# Allegro board SAPD_A3.brd
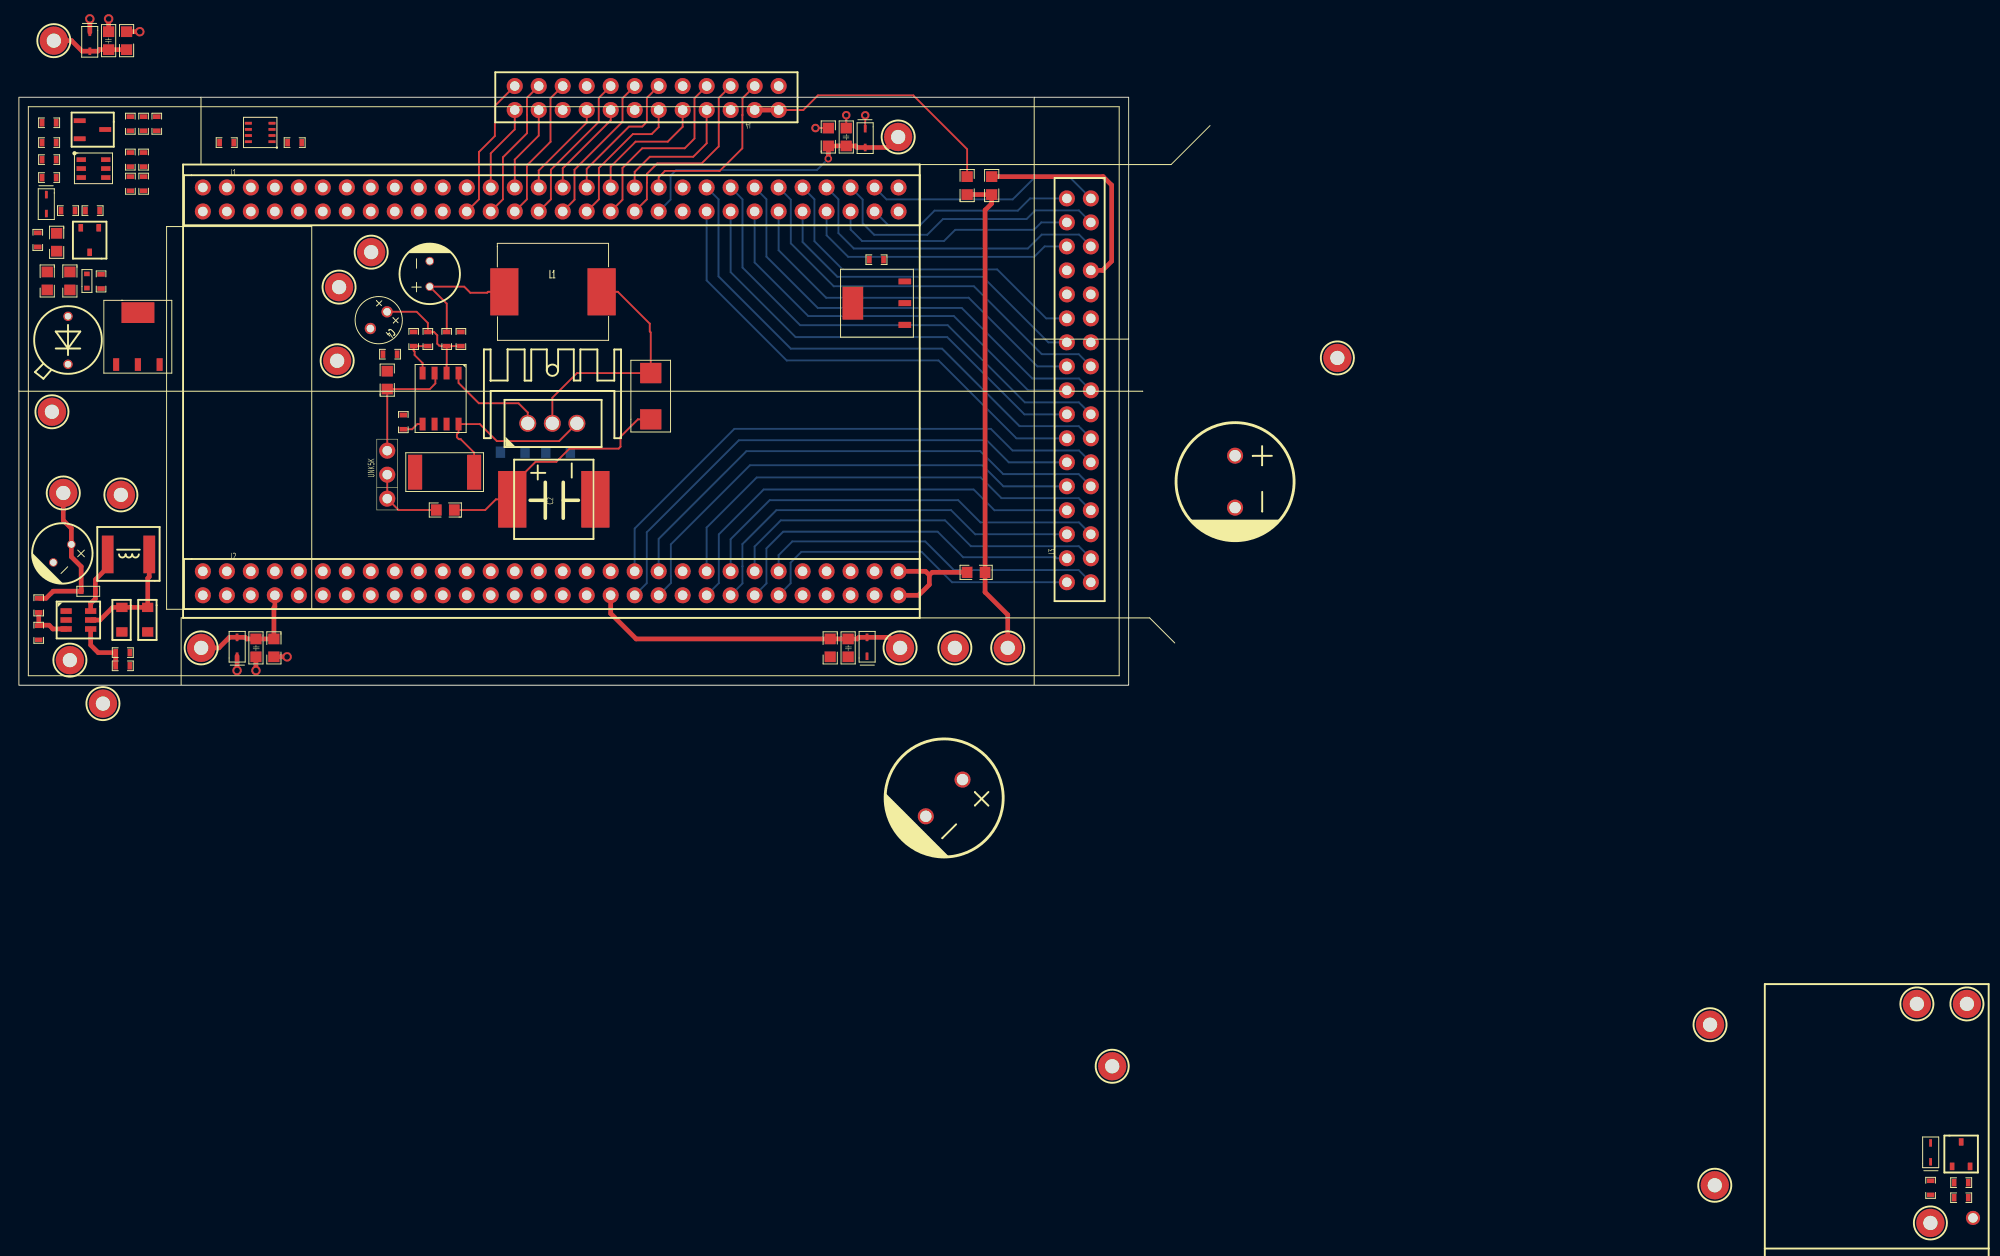
[diagram p0: board, top side]
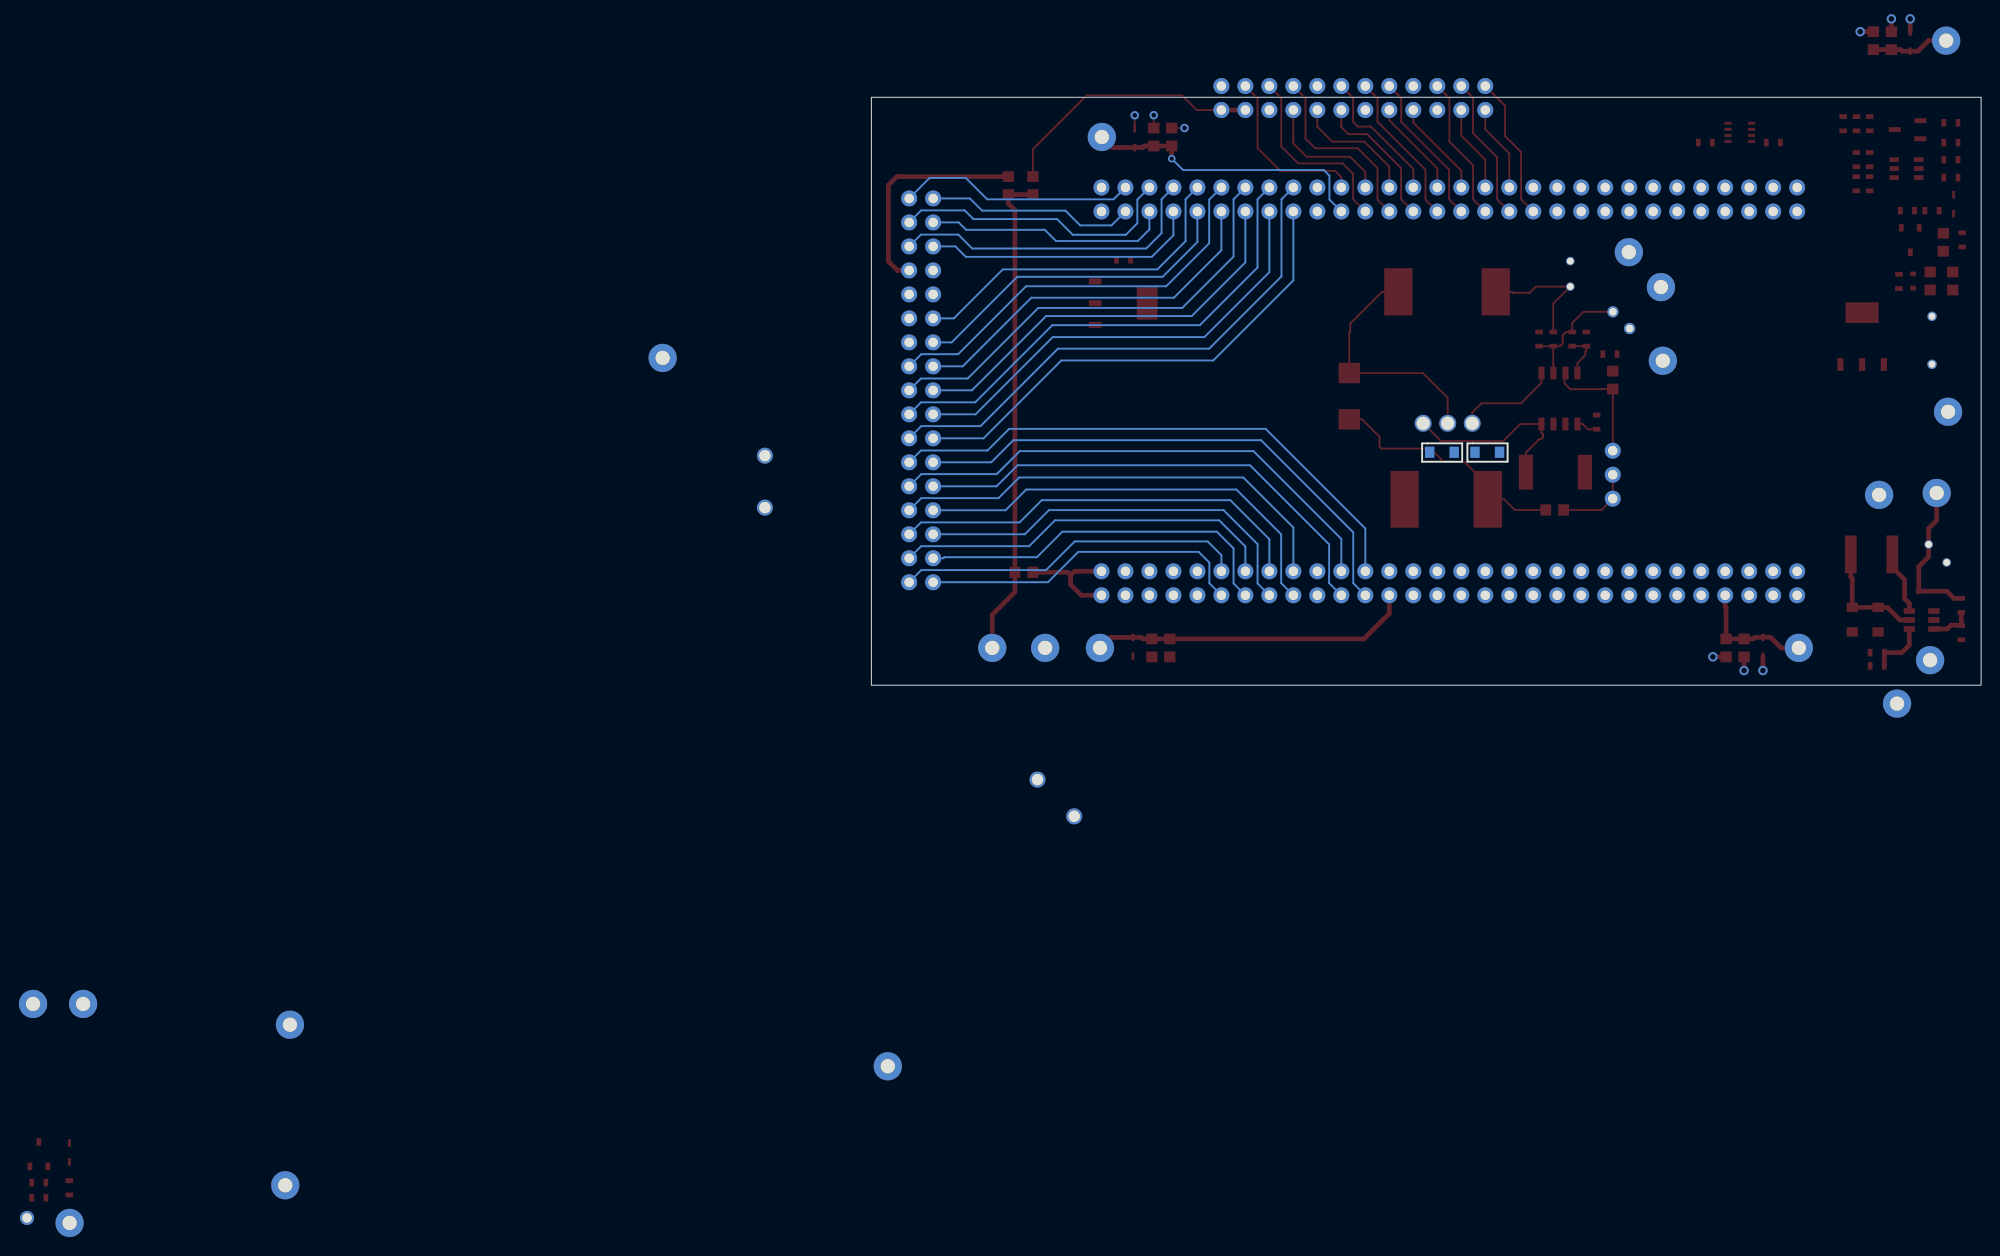
[diagram p1: board, bottom side, seen from below]

Outline 117.5 x 62.25 mm; copper layers: TOP, BOTTOM. Coordinates in mm from the lower left corner of the outline.
Outline path: rectangle 0,0 117.5,62.25

## Design rules (mm)
constraint set DEFAULT: 

## Placement (name value [footprint] x y rotation side)
C1  100uF/35V  [THR-CAP-6D3X11MM]  43.5 43.55 90 top
C2  4.7uF/400V  [SMD-CAP-8D4X8D4MM]  60.84 15.48 90 top
C3  0.1uF/16V  [C0603]  4 56.05 180 top
C4  10uF/35V  [CAP-D5XL11MM]  38.1 38.65 225 top
C5  0.1uF/16V  [C0603]  11.41 53.9 270 top
C6  10uF/16V  [C0603]  12.81 53.9 270 top
C7  0.1uF/35V  [C0603]  47.2 35.85 90 top
C8  100nF/400V  [CAP-D12D5XL16MM]  128.77 21.55 270 top
C9  0.1uF/35V  [C0603]  41.1 27.05 90 top
C15  100uF/35V  [THR-CAP-6D3X11MM]  4.6 13.95 225 top
C19  10uF/35V  [C1210]  10.89 6.95 270 top
C20  10uF/35V  [C1210]  13.62 6.95 270 top
C24  DNP  [R1210]  52.3 24.65 180 bottom
C25  0.1uF/250V  [CAP-D12D5XL16MM]  97.97 -11.94 225 top
C26  0.1uF/16V  [C0805]  24.5 5 270 top
C27  0.1uF/16V  [C0805]  10.1 67.19 90 top
C28  0.1uF/16V  [C0805]  87.2 5 270 top
C29  0.1uF/16V  [C0805]  88.2 56.99 90 top
C30  0.1uF/16V  [C0603]  1.6 47.95 270 top
C31  0.1uF/16V  [C0603]  90 44.65 0 top
C32  0.1uF/16V  [C0603]  28.4 57.05 0 top
C33  0.1uF/16V  [C0603]  21.2 57.05 0 top
D1  ES2F  [DO-214AA]  66.9 28.15 90 top
D2  PTVSLC3D3V3B  [SOD-323]  2.9 50.95 270 top
D3  BAS521  [SOD523]  7.2 42.05 90 top
D4  SAPD  [SAPD-THR-2P]  5.2 36.55 270 top
D7  BAS521-7  [SOD523]  6.6 9.95 0 top
D11  MM3Z12VT1G  [SOD-323]  202.42 -49.48 90 top
D12  PTVSLC3D3V3B  [SOD-323]  89.6 57.94 270 top
D13  PTVSLC3D3V3B  [SOD-323]  89.81 4.05 90 top
D14  PTVSLC3D3V3B  [SOD-323]  7.5 68.14 270 top
D15  PTVSLC3D3V3B  [SOD-323]  23.11 4.05 90 top
J1  Header-30x2  [DIP-30X2-2D54MM]  19.48 52.7 0 top
J2  Header-30x2  [DIP-30X2-2D54MM]  19.48 12.06 0 top
J3  Header-17x2  [DIP-17X2-2D54MM]  110.96 10.9 90 top
J4  Header-12x2  [DIP-12X2-2D54MM]  80.44 60.9 180 top
L1  100uH/2A  [IND-11D5X10X5MM]  51.4 41.65 0 top
L4  47uH/1A  [SMD-IND-5X5MM]  11.6 13.85 180 top
NOREF  -  []  0 0 90 top
NOREF#2  -  []  17.38 55.13 0 top
NOREF#3  -  []  17.38 7.13 90 top
NOREF#4  -  []  0 0 0 top
Q2  IRF644PbF  [TO-220AB]  53.88 27.73 0 top
Q3  FH3400C  [SOT-23]  7.5 47.15 180 top
Q5  FH3400C  [SOT-23]  205.64 -49.67 0 top
Q9  BSP316P  [SOT-223-3]  9.3 34.95 0 top
R3  DNP  [R0603]  11.4 60.25 270 top
R4  0  [R0603]  13.6 58.65 90 top
R5  10K  [R0603]  6 50.65 180 top
R6  100  [R0603]  8.6 50.65 180 top
R7  4.99K  [R0603]  4 59.95 180 top
R8  100K  [R0805]  3.4 47.95 270 top
R9  499  [R0603]  14.2 60.25 270 top
R10  682  [R0603]  4 57.85 180 top
R11  332K  [R0805]  2.4 43.85 270 top
R12  0  [R0805]  4.8 43.85 270 top
R13  1K  [R0603]  4 54.15 180 top
R15  1.5M  [R0805]  46.2 19.15 180 top
R16  10K  [R0603]  12.2 54.85 90 top
R17  DNP  [R0603]  44.9 37.45 270 top
R18  1M  [R0603]  9.1 41.95 90 top
R19  10K  [R0805]  39.6 31.25 90 top
R21  DNP  [R0603]  42.9 37.45 270 top
R22  10K  [R0603]  202.81 -54.02 90 top
R23  0  [R0603]  41.4 37.45 270 top
R24  DNP  [R0603]  38.5 34.65 0 top
R25  50m  [R2512]  48.2 22.55 180 top
R26  10K  [R0603]  204.85 -53.07 0 top
R28  100  [R0603]  206.45 -53.87 180 top
R33  182K  [R0603]  1.7 9.25 270 top
R35  10K  [R0603]  1.7 6.35 270 top
R36  DNP  [R0603]  11.8 3.85 180 top
R40  10K  [R0603]  11.8 2.45 180 top
R47  DNP  [R1210]  57.1 24.65 180 bottom
R48  0  [R0805]  101 51.85 90 top
R49  0  [R0805]  102.4 12.55 180 top
R50  0  [R0805]  103.6 51.85 90 top
R51  10K  [R0805]  26.4 5 270 top
R52  10K  [R0805]  12 67.19 90 top
R53  10K  [R0805]  85.3 5 270 top
R54  10K  [R0805]  86.3 56.99 90 top
R55  0  [R0603]  13.6 54.85 90 top
TP1  RESET  [TP_THR_CIR_3D0_1D5]  200.96 -33.75 0 top
TP2  VDD5X  [TP_THR_CIR_3D0_1D5]  206.26 -33.75 0 top
TP4  PWR_IN  [TP_THR_CIR_3D0_1D5]  37.3 45.85 0 top
TP5  HV1RET  [TP_THR_CIR_3D0_1D5]  179.06 -35.95 0 top
TP6  GND  [TP_THR_CIR_3D0_1D5]  115.76 -40.35 0 top
TP9  IC_PWR  [TP_THR_CIR_3D0_1D5]  33.9 42.15 0 top
TP11  ENABLE  [TP_THR_CIR_3D0_1D5]  33.7 34.35 0 top
TP12  HV1  [TP_THR_CIR_3D0_1D5]  179.56 -52.95 0 top
TP13  Vquench  [TP_THR_CIR_3D0_1D5]  202.39 -56.94 0 top
TP15  HVPS  [TP_THR_CIR_3D0_1D5]  3.5 28.95 0 top
TP16  QUENCH  [TP_THR_CIR_1D0_1D5]  206.9 -56.41 0 top
TP19  GND  [TP_THR_CIR_3D0_1D5]  10.8 20.15 0 top
TP20  Vquench  [TP_THR_CIR_3D0_1D5]  4.7 20.35 0 top
TP23  GND  [TP_THR_CIR_3D0_1D5]  5.4 2.65 0 top
TP24  5V~11V  [TP_THR_CIR_3D0_1D5]  8.9 -1.95 0 top
TP25  GND  [TP_THR_CIR_3D0_1D5]  93.1 58.05 0 top
TP26  GND  [TP_THR_CIR_3D0_1D5]  93.3 3.95 0 top
TP27  GND  [TP_THR_CIR_3D0_1D5]  3.7 68.25 0 top
TP28  GND  [TP_THR_CIR_3D0_1D5]  19.3 3.95 0 top
TP29  PWR_IN  [TP_THR_CIR_3D0_1D5]  104.7 3.95 0 top
TP30  PWR_IN  [TP_THR_CIR_3D0_1D5]  99.1 3.95 0 top
TP31  VDD5X  [TP_THR_CIR_3D0_1D5]  139.6 34.65 0 top
U1  TL431  [SOT-23-3-TL431]  6 60.25 270 top
U2  TLV3501AIDBVR  [SOT-23-6]  6.6 55.65 0 top
U3  MAX1771ESA+  [SO-8]  46.55 27.65 180 top
U5  MAX5026EUT-T  [SOT23-6]  6.3 6.95 270 top
U6  RS0102YH8  [SOT23-8]  24.3 57.55 90 top
U7  AMS1117-3.3  [SOT-223-3]  92.8 37.15 90 top
UNK5K  VR-5K  [SIP-3-2D54MM]  39 19.75 90 top

## Library data of the parts
C1 C2 C8 C15 C25 = C
C3-C7 C9 C19 C20 C24 C26-C33 = CAP NP
D1 D3 D4 D7 = DIODE
D2 D12-D15 = DIODE SCHOTTKY
D11 = DIODE ZENER
J1 J2 = Header30x2
J3 = Header-17x2
J4 = Header-12x2
L1 L4 = INDUCTOR
Q2 = IRF644PbF
Q3 Q5 = FH3400C
Q9 = BSP316P
R3-R13 R15-R19 R21-R26 R28 R33 R35 R36 R40 R47-R55 = R
TP1 TP2 TP4-TP6 TP9 TP11-TP13 TP15 TP16 TP19 TP20 TP23-TP31 = T POINT F
U1 = TL431/TI
U2 = TLV3501AIDBVR
U3 = MAX1771ESA+
U5 = MAX5026EUT-T
U6 = RS0102YH8
U7 = AMS1117-3.3
UNK5K = VR-5K

## Footprints (pads in the part's own frame, mm; a bottom-side part is the same pattern mirrored in y, then rotated)
C0603
  rect 0.5x0.8 smd: 1(0.05,0.4) 2(1.55,0.4)
C0805
  rect 1.14x1.2 smd: 1(0.1,0.6) 2(2,0.6)
C1210
  rect 1x1.2 smd: 1(-1.289,0.015) 2(1.311,0.015)
CAP-D5XL11MM
  round 1.2 hole 0.8: 1(-1.25,0) 2(1.25,0)
CAP-D12D5XL16MM
  round 1.7 hole 1.2: 1(-2.75,0) 2(2.75,0)
DIP-12X2-2D54MM
  round 1.7 hole 1: 1(0,-2.54) 2(0,0) 3(2.54,-2.54) 4(2.54,0) 5(5.08,-2.54) 6(5.08,0) 7(7.62,-2.54) 8(7.62,0) 9(10.16,-2.54) 10(10.16,0) 11(12.7,-2.54) 12(12.7,0) 13(15.24,-2.54) 14(15.24,0) 15(17.78,-2.54) 16(17.78,0) 17(20.32,-2.54) 18(20.32,0) 19(22.86,-2.54) 20(22.86,0) 21(25.4,-2.54) 22(25.4,0) 23(27.94,-2.54) 24(27.94,0)
DIP-17X2-2D54MM
  round 1.7 hole 1: 1(0,-2.54) 2(0,0) 3(2.54,-2.54) 4(2.54,0) 5(5.08,-2.54) 6(5.08,0) 7(7.62,-2.54) 8(7.62,0) 9(10.16,-2.54) 10(10.16,0) 11(12.7,-2.54) 12(12.7,0) 13(15.24,-2.54) 14(15.24,0) 15(17.78,-2.54) 16(17.78,0) 17(20.32,-2.54) 18(20.32,0) 19(22.86,-2.54) 20(22.86,0) 21(25.4,-2.54) 22(25.4,0) 23(27.94,-2.54) 24(27.94,0) 25(30.48,-2.54) 26(30.48,0) 27(33.02,-2.54) 28(33.02,0) 29(35.56,-2.54) 30(35.56,0) 31(38.1,-2.54) 32(38.1,0) 33(40.64,-2.54) 34(40.64,0)
DIP-30X2-2D54MM
  round 1.7 hole 1: 1(0,-2.54) 2(0,0) 3(2.54,-2.54) 4(2.54,0) 5(5.08,-2.54) 6(5.08,0) 7(7.62,-2.54) 8(7.62,0) 9(10.16,-2.54) 10(10.16,0) 11(12.7,-2.54) 12(12.7,0) 13(15.24,-2.54) 14(15.24,0) 15(17.78,-2.54) 16(17.78,0) 17(20.32,-2.54) 18(20.32,0) 19(22.86,-2.54) 20(22.86,0) 21(25.4,-2.54) 22(25.4,0) 23(27.94,-2.54) 24(27.94,0) 25(30.48,-2.54) 26(30.48,0) 27(33.02,-2.54) 28(33.02,0) 29(35.56,-2.54) 30(35.56,0) 31(38.1,-2.54) 32(38.1,0) 33(40.64,-2.54) 34(40.64,0) 35(43.18,-2.54) 36(43.18,0) 37(45.72,-2.54) 38(45.72,0) 39(48.26,-2.54) 40(48.26,0) 41(50.8,-2.54) 42(50.8,0) 43(53.34,-2.54) 44(53.34,0) 45(55.88,-2.54) 46(55.88,0) 47(58.42,-2.54) 48(58.42,0) 49(60.96,-2.54) 50(60.96,0) 51(63.5,-2.54) 52(63.5,0) 53(66.04,-2.54) 54(66.04,0) 55(68.58,-2.54) 56(68.58,0) 57(71.12,-2.54) 58(71.12,0) 59(73.66,-2.54) 60(73.66,0)
DO-214AA
  rect 2.16x2.26 smd: 1(0,0) 2(4.9,0)
IND-11D5X10X5MM
  rect 3x5 smd: 1(0,0) 2(10.3,0)
R0603
  rect 0.5x0.8 smd: 1(0.05,0.4) 2(1.55,0.4)
R0805
  rect 1.14x1.2 smd: 1(0.1,0.6) 2(2,0.6)
R1210
  rect 1x1.2 smd: 1(-1.289,0.015) 2(1.311,0.015)
R2512
  rect 1.5x3.7 smd: 1(0,0) 2(6.25,0)
SAPD-THR-2P
  round 1 hole 0.7: 1(2.576,0) 2(-2.504,0)
SIP-3-2D54MM
  round 1.7 hole 1: 1(0,0) 2(2.54,0) 3(5.08,0)
SMD-CAP-8D4X8D4MM
  rect 6x3 smd: 1(4.2,8.6) 2(4.2,-0.2)
SMD-IND-5X5MM
  rect 1.25x4 smd: 1(-2.2,0) 2(2.2,0)
SO-8
  rect 0.65x1.35 smd: 1(0,-5.4) 2(1.27,-5.4) 3(2.54,-5.4) 4(3.81,-5.4) 5(3.81,0) 6(2.54,0) 7(1.27,0) 8(0,0)
SOD523
  rect 0.5x0.6 smd: 1(0,0) 2(1.5,0)
SOD-323
  rect 0.8x0.3 smd: 1(-0.99,0.01) 2(1.01,0.01)
SOT23-6
  rect 0.6x1.2 smd: 1(-0.9,-1.3) 2(0.05,-1.3) 3(1,-1.3) 4(1,1.3) 5(0.05,1.3) 6(-0.9,1.3)
SOT23-8
  rect 0.3x0.75 smd: 1(0,-2.5) 2(0.65,-2.5) 3(1.3,-2.5) 4(1.95,-2.5) 5(1.95,0) 6(1.3,0) 7(0.65,0) 8(0,0)
SOT-23
  rect 0.5x0.8 smd: 1(-0.95,-1.28) 2(0.95,-1.28) 3(0.01,1.31)
SOT-23-3-TL431
  rect 0.51x1.27 smd: 1(0.476,0.434) 2(1.415,3.142) 3(2.391,0.434)
SOT-23-6
  rect 1x0.5 smd: 1(0,0) 2(0,-0.95) 3(0,-1.9) 4(2.6,-1.9) 5(2.6,-0.95) 6(2.6,0)
SOT-223-3
  rect 0.65x1.35 smd: 1(1,-1) 2(3.3,-1) 3(5.6,-1)
  rect 3.5x2.2 smd: 4(3.3,4.5)
THR-CAP-6D3X11MM
  round 0.9 hole 0.7: 1(-1.35,0) 2(1.35,0)
TO-220AB
  round 1.8 hole 1.4: 1(0,0) 2(2.6,0) 3(5.2,0)
TP_THR_CIR_1D0_1D5
  round 1.5 hole 1: 1(0,0)
TP_THR_CIR_3D0_1D5
  round 3 hole 1.5: 1(0,0)

## Nets
15V_IN: C1.1 L1.1 R17.1 TP4.1(TP)
GND: C1.2 C2.2 C4.2 C7.2 C8.2 C9.2 C26.2 C27.2 C28.2 C29.2 C31.1 C32.2 C33.1 D12.1 D13.1 D14.1 D15.1 J1.1 J1.2 J1.19 J1.20 J1.41 J1.42 J1.59 J1.60 J2.1 J2.2 J2.19 J2.20 J2.41 J2.42 J2.57 J2.58 J3.21 J3.25 J3.28 J4.6 J4.9 J4.14 J4.20 R19.2 R23.1 R25.2 TP5.1(TP) TP6.1(TP) TP30.1(TP) U3.6 U3.7 U6.5 U7.1
GND_FIELD SIGNAL: C3.2 C5.2 C6.2 D2.1 Q3.2(S) Q5.2(S) R3.2 R5.2 R8.1 R10.2 R16.2 R18.1 R26.2 U1.2 U2.2(V-) U2.6
GND_QUENCH: C15.2 C19.2 C20.2 R35.2 R36.1 TP19.1(TP) TP23.1(TP) U5.1 U5.2
V3V3: C32.1 U6.1(VCCB) U7.2(VOUT) U7.4
VCC33: J3.23 J3.26
VDD5_ARM: J4.2 J4.4 R48.2
VDD5_EXT: R48.1 R49.1 R50.1 R51.2 R52.2 R53.2 R54.2 TP29.1(TP)
VDD5_FPGA: J2.59 J2.60 R49.2
VDD5_LCD: J3.27 R50.2
VDD5X: C5.1 C6.1 C31.2 C33.2 R9.1 TP2.1(TP) U2.4 U6.8 U7.3
A12: J1.3
A13: J1.5
A14: J1.7
B12: J1.4
B14: C27.1 D14.2(CATHODE) J1.8 R52.1 TP27.1(TP)
B15: J1.12
B16: J1.11
BL_CTR: J1.52 J3.24
C13: J1.6
C15: J1.14
C16: J1.13
CS: J2.49 J3.2
D11: J1.10
D12: J1.9
D14: J1.26 J4.24
D16: J1.25 J4.21
DONE_2: J2.56
E1: J2.3
E2: J2.4
E3: C26.1 D15.2(CATHODE) J2.7 R51.1 TP28.1(TP)
E4: J2.8
E15: J1.16
E16: J1.15
EN: R24.1 TP11.1(TP)
F1: J2.5
F2: J2.6
F3: J2.9
F4: J2.10
F5: J2.15
F6: J2.16
F13: J1.30 J4.18
F14: J1.29 J4.15
F15: J1.18
F16: J1.17
G1: J2.11
G3: J2.12
G5: J2.17
G6: J2.18
G12: J1.40 J4.3
G14: J1.34 J4.11
G16: J1.33 J4.12
GPIOA2: J1.31 J4.13
GPIOG8: J1.32 J4.16
GPIOG11: J1.35 J4.7
H1: J2.13
H2: J2.14
H11: C29.1 D12.2(CATHODE) J1.39 R54.1 TP25.1(TP)
H13: J1.36 J4.10
H15: J1.22
H16: J1.21
I2C0_SCL: J1.37 J4.5
J1: J2.23
J3: J2.24
J4: J2.21
J11: J1.44 J3.13
J12: J1.43 J3.14
J13: J1.46 J3.15
K1: J2.25
K2: J2.26
K3: J2.22
K14: J1.45 J3.16
K15: J1.24
K16: J1.23 J4.23
KEY_NEXT: C28.1 D13.2(CATHODE) J2.35 R53.1 TP26.1(TP)
L1: J2.29
L3: J2.30
L4: J2.28
L5: J2.27
L14: J1.48 J3.17
L16: J1.47 J3.18
LCD_D0: J2.46 J3.5
LCD_D1: J2.43 J3.8
LCD_D2: J2.44 J3.7
LCD_D3: J2.39 J3.10
LCD_D4: J2.40 J3.9
LCD_D5: J2.37 J3.12
LCD_D6: J2.38 J3.11
LCD_D13: J1.49 J3.20
LCD_D14: J1.50 J3.19
LCD_D15: J1.51 J3.22
M1: J2.33
M2: J2.34
M5: J2.32
M15: J1.28 J4.22
M16: J1.27 J4.19
N3: J2.36
N4: J2.31
P6: J2.48 J3.3
P10_IO_DIN: J2.53
PROGRAM_B: J2.52
PULSE: U6.2
QUENCH_VOLTAGE_DOWN: R28.1 TP16.1(TP)
R3_IO_INIT: J2.54
R7: J2.50 J3.1
R9: J1.58 J3.33
R11: J2.55
R12: J1.56 J3.31
R15: J1.38 J4.8
RESET_DISCHARGE: R6.1 TP1.1(TP)
RST: J2.45 J3.6
RT_MISO: J1.53 J3.30
SIG: R16.1 R55.1 U2.5
T6: J2.47 J3.4
T8: J2.51
T9: J1.57 J3.34
T12: J1.55 J3.32
T14: J1.54 J3.29
VQUENCH: Q9.3(S) R22.1 TP13.1(TP)
N00177: Q2.1 U3.1
N00181: C24.2 Q2.3(S) R25.1 U3.8
N00224: D1.2 L1.2 Q2.2 R47.1
N00386: C4.1 C7.1 R17.2 R21.1 TP9.1(TP) U3.2(V+)
N00671: C9.1 U3.5
N01266: C2.1 C8.1 C25.1 D1.1(K) R15.1 TP12.1(TP)
N03183: R21.2 R23.2 R24.2 U3.4
N281389: C24.1 R47.2
N281531: R19.1 U3.3 UNK5K.3
N298732: C30.2 R8.2 R11.1
N299116: D3.1(K) D4.2 R11.2 R12.2
N299256: Q3.1 R5.1 R6.2
N299321: Q3.3 R12.1
N300319: D3.2 Q9.2 Q9.4 R18.2
N301013: Q5.1 R26.1 R28.2
N302715: C19.1 C20.1 L4.1 R40.1 TP24.1(TP) U5.5(VCC)
N302737: D7.2 L4.2 U5.6
N302899: C15.1 D7.1(K) R33.1 TP20.1(TP)
N302936: R33.2 R35.1 U5.3
N303320: R36.2 R40.2 U5.4
N306830: D11.1(CATHODE) Q9.1 R22.2
N312166: D4.1(K) TP15.1(TP)
N314005: C30.1 D2.2(CATHODE) R13.2
N314013: R13.1 U2.3
N314083: C3.1 R7.2 R10.1 U2.1
N315595: R4.1 R9.2 U1.3
N315695: R3.1 R4.2 R7.1 U1.1(REF)
N320746: D11.2 Q5.3
N333521: C25.2 R15.2 UNK5K.1 UNK5K.2
N336971: J4.1 J4.17
N341930: R55.2 U6.7
N342111: TP31.1(TP) U6.4

Pads without a net: U6 3 6

## Via types
v1: diameter 1, hole 0.6, TOP to BOTTOM, 6 vias
v2: diameter 0.9, hole 0.5, TOP to BOTTOM, 3 vias
v3: diameter 0.8, hole 0.45, TOP to BOTTOM, 1 via

## Routing (per net, layer and track width the routed paths; a pad name or vN(x,y) marks a point on that pad's centre or on a via; arc(x,y) is an arc through that point)
15V_IN: length 13.8
  TOP w0.2: R17.1 45.3,40.4 C1.1 47.15,42.2 47.8,41.55 49.57,41.55 49.67,41.65 L1.1
GND: length 8.5
  TOP w0.2: C29.2 v2(87.6,60.35) ; D12.1 v2(89.61,60.34)
  TOP w0.5: D15.1 v1(23.1,1.55) ; D14.1 v1(7.51,70.55) ; C26.2 v1(25.1,1.55) ; C27.2 v1(9.5,70.55)
VDD5_ARM: length 28.4
  TOP w0.2: J4.2 83.05,60.9 84.6,62.45 94.7,62.45 100.4,56.75 R48.2
  TOP w0.5: J4.4 J4.2
VDD5_EXT: length 56
  TOP w0.2: R54.2 v2(84.34,58.99)
  TOP w0.5: TP29.1 104.7,7.45 102.3,9.85 R49.1 102.3,50.3 103,51 R50.1 R48.1 ; R52.2 v1(12.8,69.19) ; R51.2 v1(28.4,3)
VDD5_FPGA: length 12.3
  TOP w0.5: 96.4,11.65 96.4,10.65 95.27,9.52 J2.59 ; 96.4,11.65 95.99,12.06 J2.60 ; 96.4,11.65 96.7,11.95 R49.2
VDD5_LCD: length 23.7
  TOP w0.5: J3.27 114.73,43.92 115.7,44.89 115.7,52.95 114.8,53.85 R50.2
B14: length 8.2
  TOP w0.5: R52.1 C27.1 8.52,67.3 8.36,67.13 D14.2 6.69,67.13 5.58,68.25 TP27.1
BL_CTR: length 36.3
  BOTTOM w0.2: J1.52 84.23,51.45 84.23,47.01 87.22,44.02 103.58,44.02 108.76,38.84 J3.24
CS: length 35
  BOTTOM w0.2: J2.49 81.71,10.79 81.71,12.98 82.85,14.12 95.59,14.12 98.8,10.9 J3.2
D14: length 9.3
  TOP w0.2: J1.26 49.96,56.31 52.5,58.85 J4.24
D16: length 15.4
  TOP w0.2: J4.21 53.79,62.19 53.79,60.38 53.8,60.37 53.8,58.45 51.25,55.9 51.25,51.45 J1.25
E3: length 12.9
  TOP w0.5: J2.7 27.1,8.29 27,8.19 R51.1 C26.1 24.12,4.9 23.96,5.06 D15.2 23.09,5.07 22.3,5.07 21.18,3.95 TP28.1
F13: length 10.3
  TOP w0.2: J1.30 55.04,54.49 60.12,59.57 J4.18
F14: length 16.4
  TOP w0.2: J1.29 56.33,51.45 56.33,54.58 61.4,59.65 61.4,62.18 J4.15
G12: length 18.3
  TOP w0.2: J1.40 67.74,53.79 68.4,54.45 74.2,54.45 76.6,56.85 76.6,60.37 76.61,60.38 76.61,62.15 J4.3
G14: length 14.7
  TOP w0.2: J4.11 66.49,62.19 66.49,59.64 66,59.15 64.6,59.15 60.12,54.67 J1.34
G16: length 15.1
  TOP w0.2: J1.33 61.41,51.45 61.41,54.76 65,58.35 67,58.35 67.74,59.09 J4.12
GPIOA2: length 16.4
  TOP w0.2: J1.31 58.83,51.41 58.83,54.58 63.91,59.66 63.91,62.15 J4.13
GPIOG8: length 10.3
  TOP w0.2: J1.32 57.58,54.73 62.66,59.81 J4.16
GPIOG11: length 20.1
  TOP w0.2: J1.35 63.91,51.41 63.91,54.76 66,56.85 70.5,56.85 71.53,57.88 71.53,62.15 J4.7
H11: length 31
  TOP w0.5: TP25.1 91.98,56.93 D12.2 88.74,56.93 88.58,57.09 C29.1 R54.1 v3(85.7,55.75)
  BOTTOM w0.2: J1.39 69,51.42 69,53.95 69.6,54.55 84.5,54.55 v3(85.7,55.75)
H13: length 13.3
  TOP w0.2: J4.10 70.28,59.13 68.7,57.55 65.3,57.55 62.66,54.91 J1.36
I2C0_SCL: length 20.2
  TOP w0.2: J4.5 74.1,62.18 74.1,57.05 72.3,55.25 67.6,55.25 66.5,54.15 66.5,53.23 66.49,53.22 66.49,51.45 J1.37
J11: length 56.5
  BOTTOM w0.2: J1.44 74.08,51.44 74.08,43.28 81.73,35.63 97.75,35.63 105.95,27.43 112.21,27.43 J3.13
J12: length 52.4
  BOTTOM w0.2: J1.43 72.82,42.86 81.3,34.38 97.38,34.38 105.62,26.14 J3.14
J13: length 52.3
  BOTTOM w0.2: J1.46 76.62,51.44 76.62,44.22 82.72,38.12 98.34,38.12 106.51,29.95 112.23,29.95 J3.15
K14: length 48.3
  BOTTOM w0.2: J3.16 106.46,28.68 98.29,36.86 82.23,36.86 75.36,43.73 J1.45
K16: length 15.4
  TOP w0.2: J4.23 50.4,61.34 50.4,58.15 48.71,56.46 48.71,51.45 J1.23
KEY_NEXT: length 34.2
  TOP w0.5: TP26.1 92.19,5.06 D13.2 88.94,5.06 88.78,4.9 C28.1 R53.1 65.35,4.9 62.66,7.59 J2.35
L14: length 48.1
  BOTTOM w0.2: J1.48 79.15,51.45 79.15,45.38 84.58,39.95 99.83,39.95 107.3,32.47 112.25,32.47 J3.17
L16: length 44.1
  BOTTOM w0.2: J3.18 106.86,31.22 99,39.08 83.58,39.08 77.9,44.76 J1.47
LCD_D0: length 44.7
  BOTTOM w0.2: J2.46 75.36,15.45 79.5,19.59 99.45,19.59 101.81,17.24 112.24,17.24 J3.5
LCD_D1: length 46.7
  BOTTOM w0.2: J3.8 103.29,18.52 101.09,20.72 78.86,20.72 74.11,15.97 74.11,10.81 J2.43
LCD_D2: length 49
  BOTTOM w0.2: J3.7 112.22,19.8 104.03,19.8 101.84,22 78.12,22 72.82,16.7 J2.44
LCD_D3: length 52.3
  BOTTOM w0.2: J3.10 104.24,21.06 102.01,23.28 77.41,23.28 69.03,14.91 69.03,11.54 69.04,11.53 69.04,10.82 J2.39
LCD_D4: length 54.6
  BOTTOM w0.2: J3.9 112.21,22.35 104.22,22.35 101.78,24.78 77.04,24.78 67.74,15.49 J2.40
LCD_D5: length 56.7
  BOTTOM w0.2: J2.37 66.48,10.8 66.48,16.19 76.23,25.94 102.47,25.94 104.81,23.6 J3.12
LCD_D6: length 58.7
  BOTTOM w0.2: J3.11 112.25,24.85 105.21,24.85 102.92,27.14 75.75,27.14 65.2,16.59 J2.38
LCD_D13: length 39.7
  BOTTOM w0.2: J3.20 107.83,33.76 100.57,41.02 85.47,41.02 80.44,46.05 J1.49
LCD_D14: length 43.6
  BOTTOM w0.2: J3.19 112.21,35.05 108.31,35.05 101.12,42.24 86.28,42.24 81.73,46.79 81.73,51.41 J1.50
LCD_D15: length 35.6
  BOTTOM w0.2: J1.51 82.98,46.92 86.66,43.24 102.06,43.24 109,36.3 J3.22
M15: length 9.3
  TOP w0.2: J4.22 55.04,58.19 52.5,55.65 J1.28
M16: length 15.4
  TOP w0.2: J1.27 53.79,51.45 53.79,55.04 56.29,57.54 56.29,62.15 J4.19
P6: length 41
  BOTTOM w0.2: J3.3 112.22,14.72 100.8,14.72 98.06,17.45 80.67,17.45 77.9,14.68 J2.48
R7: length 37.2
  BOTTOM w0.2: J2.50 80.44,13.77 81.89,15.22 95.97,15.22 99,12.19 112.21,12.19 J3.1
R9: length 25.3
  BOTTOM w0.2: J1.58 91.86,51.44 105.23,51.44 107.49,53.71 111.33,53.71 J3.33
R12: length 30.6
  BOTTOM w0.2: J3.31 112.23,50.27 107.61,50.27 106.69,49.35 97.84,49.35 96.18,47.69 90.56,47.69 89.34,48.91 89.34,51.42 J1.56
R15: length 14.1
  TOP w0.2: J1.38 65.2,54.35 66.8,55.95 71.4,55.95 72.82,57.37 J4.8
RST: length 42.8
  BOTTOM w0.2: J2.45 76.61,10.77 76.61,12.58 76.61,12.58 76.61,14.93 80.21,18.53 98.7,18.53 101.25,15.98 J3.6
RT_MISO: length 29.4
  BOTTOM w0.2: J1.53 85.52,47.64 87.8,45.35 107.5,45.35 108.61,46.46 J3.30
T6: length 39.2
  BOTTOM w0.2: J2.47 79.15,10.77 79.15,14.48 80.92,16.25 97.27,16.25 99.98,13.55 109.78,13.55 109.88,13.44 J3.4
T9: length 22.2
  BOTTOM w0.2: J3.34 107.06,51.54 105.77,50.25 96.95,50.25 95.39,48.69 92.07,48.69 J1.57
T12: length 26.1
  BOTTOM w0.2: J1.55 88.06,48.25 89.28,47.03 97.95,47.03 99.14,48.21 107.47,48.21 108.25,49 J3.32
T14: length 33.9
  BOTTOM w0.2: J1.54 86.77,51.45 86.77,47.87 88.4,46.24 106.83,46.24 108.3,47.71 112.25,47.71 J3.29
N00177: length 10.8
  TOP w0.2: Q2.1 53.88,28.87 52.9,29.85 48.7,29.85 46.55,32 U3.1
N00181: length 20.1
  TOP w0.2: R25.1 48.2,24.63 46.78,26.05 46.58,26.05 46.38,26.25 46.38,26.57 46.55,26.75 U3.8 48.8,27.65 50.6,25.85 57.2,25.85 Q2.3
N00224: length 26
  TOP w0.2: Q2.2 56.48,30.43 59.1,33.05 D1.2 66.9,37.35 66.8,37.45 66.8,38.28 63.43,41.65 L1.2
N00386: length 13.3
  TOP w0.2: U3.2 45.28,33.95 45.3,33.97 R17.2 ; R17.2 C7.1 ; R17.2 44.67,35.9 44.62,35.95 44.5,35.95 44.3,36.15 44.3,37.05 43.95,37.4 R21.1 43.3,38.35 42.12,39.53 C4.1
N00671: length 2.3
  TOP w0.2: U3.5 42.19,27.65 41.64,27.1 C9.1
N01266: length 26.3
  TOP w0.2: R15.1 49.38,18.55 50.51,19.68 C2.1 52.24,21.18 54.71,23.65 56.9,23.65 58.3,25.05 63.5,25.05 63.7,25.25 63.7,26.31 65.54,28.15 D1.1
N03183: length 4.7
  TOP w0.2: U3.4 42.74,34.11 41.9,34.95 41.9,35.32 41.8,35.42 R23.2 R21.2
N281531: length 13
  TOP w0.2: U3.3 44.1,32.96 44.1,31.95 43.5,31.35 R19.1 UNK5K.3
N302715: length 12.3
  TOP w0.5: U5.5 8.59,6.9 9.93,8.24 C19.1 C20.1 13.64,11.31 13.8,11.47 L4.1
N302737: length 6.7
  TOP w0.5: U5.6 7.6,8.65 8.1,9.15 D7.2 8.1,11.17 9.4,12.48 L4.2
N302899: length 16
  TOP w0.5: TP20.1 4.7,17.45 5.55,16.6 C15.1 5.55,13.6 6.6,12.55 D7.1 3.63,9.95 2.88,9.2 R33.1
N302936: length 4.5
  TOP w0.5: U5.3 3.6,5.95 3.2,6.35 2.15,6.35 R35.1 R33.2
N303320: length 6.1
  TOP w0.5: U5.4 7.6,4.25 8.4,3.45 R36.2 R40.2
N333521: length 8.2
  TOP w0.2: UNK5K.2 UNK5K.1 40.2,18.55 R15.2

## Text on the board
PEN82: 48 | 74 | 78 | 38.1
User.6: T | R | P | N | M | L | K | J | H | G | F | E | D | C | B | A | 1 | 2 | 3 | 4 | 5 | 6 | 7 | 8 | 9 | 10 | 12 | 14 | 16
User.8: USB | POWER | JTAG | KEY | LED0 | 3.3V | 1.2V | 2.5V | XILINX SPARTAN-6 FPGA S604
